# EAGLE board Layer 1 (EAGLE 6.5.0)
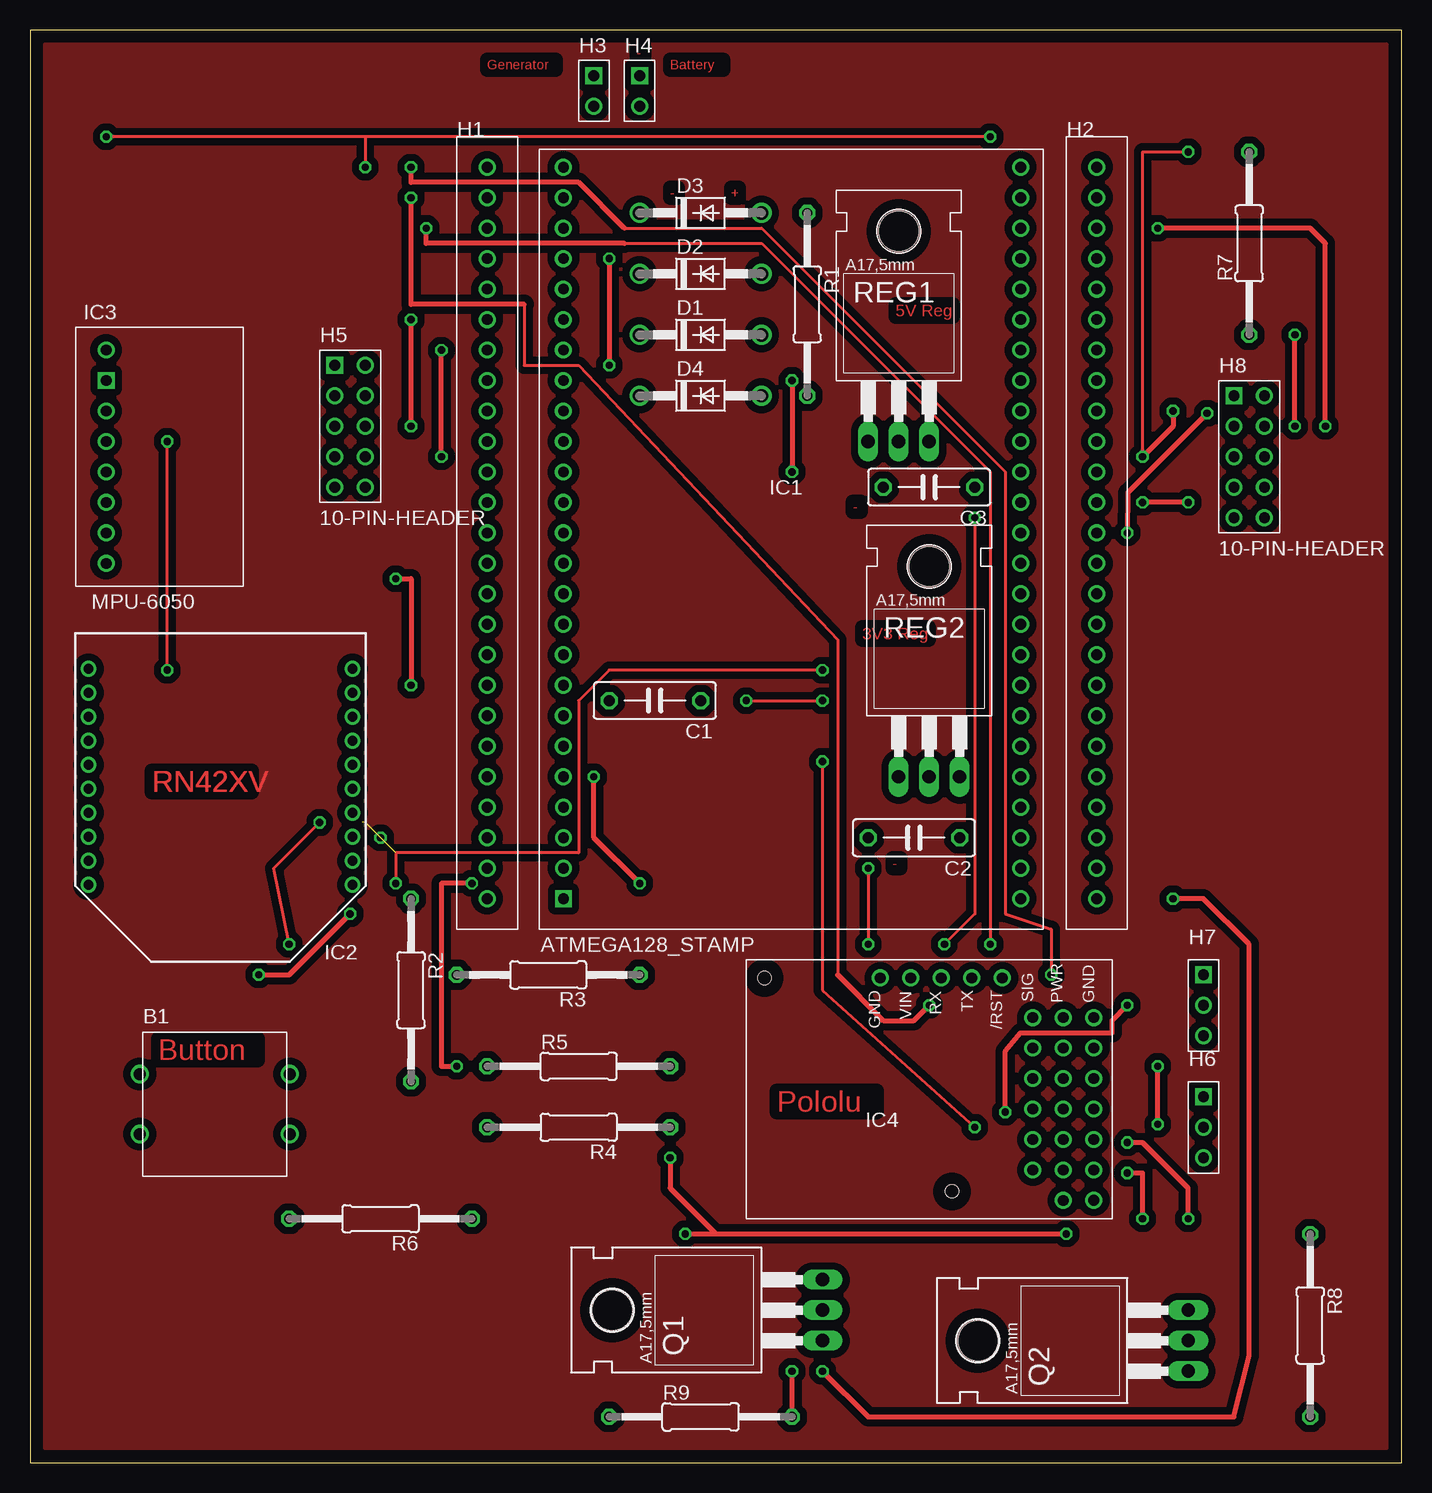
[diagram p0: board, top side]
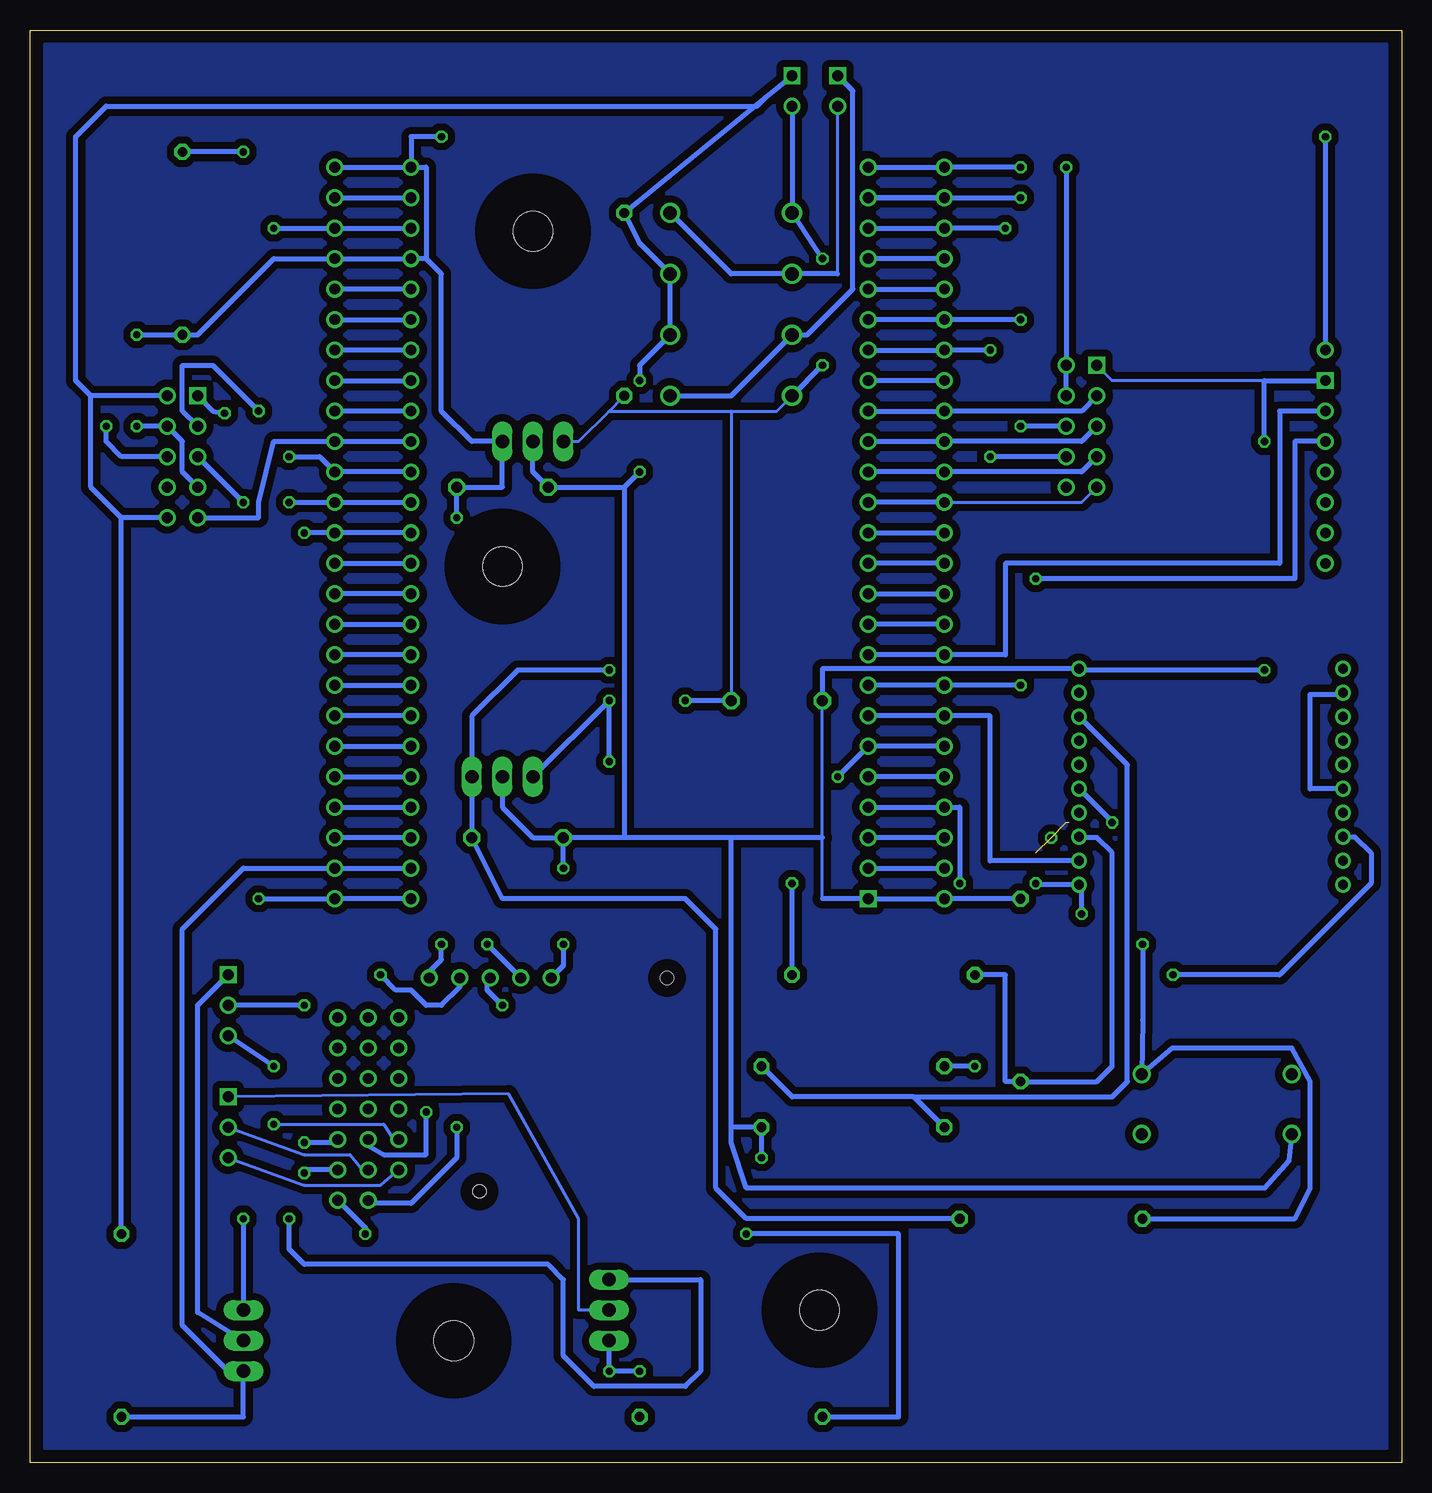
[diagram p1: board, bottom side, seen from below]

Size 114.3 x 119.38 mm. Coordinates in mm from the lower left corner, seen from the top.
Outline: 0,0 114.3,0 114.3,119.38 0,119.38 0,0
Copper layers (1*16): Top 0.035mm / dielectric 1.5mm / Bottom 0.035mm
Design rules "default": minimum track width 10mil, minimum drill 24mil, track to track 8mil, track to pad 8mil, pad to pad 8mil, via to via 8mil, smd to smd 8mil, copper to edge 40mil, drill to drill 8mil, minimum pad ring 10mil, minimum via ring 8mil, stop-mask expansion 4mil, vias tented up to drill 0mil, thermal gap 10mil

## Footprints (pad centres in the part's own frame; a part is rotated, then mirrored left to right if it is on the bottom)
BUTTON = drill 1: P1 -0.25,8.5; P2 -0.25,3.5; P3 12.25,8.5; P4 12.25,3.5
C075-032X103 = drill 0.914 octagon: 1 -3.81,0; 2 3.81,0
DO41-10 = drill 1.118: A 5.08,0; C -5.08,0
25-PIN-HEADER = drill 0.9: P$1 -7.62,15.24; P$2 -7.62,12.7; P$3 -7.62,10.16; P$4 -7.62,7.62; P$5 -7.62,5.08; P$6 -7.62,2.54; P$7 -7.62,0; P$8 -7.62,-2.54; P$9 -7.62,-5.08; P$10 -7.62,-7.62; P$11 -7.62,-10.16; P$12 -7.62,-12.7; P$13 -7.62,-15.24; P$14 -7.62,-17.78; P$15 -7.62,-20.32; P$16 -7.62,-22.86; P$17 -7.62,-25.4; P$18 -7.62,-27.94; P$19 -7.62,-30.48; P$20 -7.62,-33.02; P$21 -7.62,-35.56; P$22 -7.62,-38.1; P$23 -7.62,-40.64; P$24 -7.62,-43.18; P$25 -7.62,-45.72
2-PIN-HEADER = drill 0.9 square: P1 -17.78,6.35 | drill 0.9: P2 -17.78,3.81
10-PIN-HEADER = drill 0.9 square: 1 0,12.7 | drill 0.9: 2 2.54,12.7; 3 0,10.16; 4 2.54,10.16; 5 0,7.62; 6 2.54,7.62; 7 0,5.08; 8 2.54,5.08; 9 0,2.54; 10 2.54,2.54
3-PIN-HEADER = drill 0.9 square: P1 -12.7,10.16 | drill 0.9: P2 -12.7,7.62; P3 -12.7,5.08
ATMEGA128_STAMP = drill 0.9: +5V 45.72,63.5; /PEN 45.72,60.96; /RES 45.72,58.42; PA0 45.726,2.543; PA1 45.726,5.083; PA2 45.726,7.623; PA3 45.726,10.163; PA4 45.72,12.7; PA5 45.72,15.24; PA6 45.72,17.78; PA7 45.72,20.32; PB0 7.62,43.18; PB1 7.62,40.64; PB2 7.62,38.1; PB3 7.62,35.56; PB4 7.62,33.02; PB5 7.62,30.48; PB6 7.62,27.94; PB7 7.62,25.4; PD0 7.62,22.86; PD1 7.62,20.32; PD2 7.62,17.78; PD3 7.62,15.24; PD4 7.623,12.703; PD5 7.626,10.163; PD6 7.626,7.623; PD7 7.626,5.083; PE0 7.62,63.5; PE1 7.62,60.96; PE2 7.62,58.42; PE3 7.62,55.88; PE4 7.62,53.34; PE5 7.62,50.8; PE6 7.62,48.26; PE7 7.62,45.72; PF0 45.72,22.86; PF1 45.72,25.4; PF2 45.72,27.94; PF3 45.72,30.48; PF4 45.72,33.02; PF5 45.72,35.56; PF6 45.72,38.1; PF7 45.72,40.64; PG0 45.72,43.18; PG1 45.72,45.72; PG2 45.72,48.26; PG3 45.72,50.8; PG4 45.72,53.34; VREF 45.72,55.88 | drill 0.9 square: GND 7.626,2.543
RN42XV = drill 0.8 pad 1.27: 3V3 3.92,17.985; AIO0 1.92,-4.015; AIO1 3.92,-4.015; CTS -4.08,-4.015; GND -14.08,17.985; GPIO2 -10.08,-4.015; GPIO3 -2.08,-4.015; GPIO4 -10.08,17.985; GPIO5 -6.08,-4.015; GPIO6 -6.08,17.985; GPIO7 -2.08,17.985; GPIO7_ -0.08,-4.015; GPIO8 -14.08,-4.015; GPIO9 -8.08,17.985; GPIO11 -12.08,17.985; NC -8.08,-4.015; RESET_N -4.08,17.985; RTS -12.08,-4.015; RXD -0.08,17.985; TXD 1.92,17.985
MPU-6050 = drill 0.9: AD0 2.54,5.08; INT 2.54,2.54; SCL 2.54,15.24; SDA 2.54,12.7; VCC 2.54,20.32; XCL 2.54,7.62; XDA 2.54,10.16 | drill 0.9 square: GND 2.54,17.78
POLOLU_MICRO_MAESTRO = drill 0.9: /RST -21.336,1.524; GND -28.956,20.041; GND0 -28.956,17.526; GND1 -28.956,14.986; GND2 -28.956,12.446; GND3 -28.956,9.906; GND4 -28.956,7.366; GND5 -28.956,4.826; GND_ -11.176,1.524; RX -16.256,1.524; SIG0 -23.876,17.526; SIG1 -23.876,14.986; SIG2 -23.876,12.446; SIG3 -23.876,9.906; SIG4 -23.876,7.366; SIG5 -23.876,4.826; TX -18.796,1.524; V0 -26.416,17.526; V1 -26.416,14.986; V2 -26.416,12.446; V3 -26.416,9.906; V4 -26.416,7.366; V5 -26.416,4.826; VCC -26.416,20.066; VIN -13.716,1.524 | hole 1.092: -1.524,1.524; -17.145,19.304
TO220BH = drill 1.118 long: D 0,-6.35; G -2.54,-6.35; S 2.54,-6.35 | hole 3.302: 0,11.176
0207/15 = drill 0.813 octagon: 1 -7.62,0; 2 7.62,0
TO220 = drill 1.118 long: GND 0,-6.35; IN -2.54,-6.35; OUT 2.54,-6.35 | hole 3.302: 0,11.176

## Placement (x,y rotation side)
B1  BUTTON  [BUTTON]  9.4,23.88 0 top
C1  [C075-032X103]  52.07,63.5 180 top
C2  [C075-032X103]  73.66,52.07 180 top
C3  [C075-032X103]  74.93,81.28 180 top
D1  1N4004  [DO41-10]  55.88,93.98 0 top
D2  1N4004  [DO41-10]  55.88,99.06 0 top
D3  1N4004  [DO41-10]  55.88,104.14 0 top
D4  1N4004  [DO41-10]  55.88,88.9 0 top
H1  25-PIN-HEADER  [25-PIN-HEADER]  45.72,92.71 0 top
H2  25-PIN-HEADER  [25-PIN-HEADER]  96.52,92.71 0 top
H3  2-PIN-HEADER  [2-PIN-HEADER]  64.77,109.22 0 top
H4  2-PIN-HEADER  [2-PIN-HEADER]  68.58,109.22 0 top
H5  10-PIN-HEADER  [10-PIN-HEADER]  25.4,78.74 0 top
H6  3-PIN-HEADER  [3-PIN-HEADER]  110.49,20.32 0 top
H7  3-PIN-HEADER  [3-PIN-HEADER]  110.49,30.48 0 top
H8  10-PIN-HEADER  [10-PIN-HEADER]  100.33,76.2 0 top
IC1  ATMEGA128_STAMP  [ATMEGA128_STAMP]  36.83,44.45 0 top
IC2  RN42XV  [RN42XV]  8.89,52.07 270 top
IC3  MPU-6050  [MPU-6050]  3.81,72.39 0 top
IC4  POLOLU_MICRO_MAESTRO  [POLOLU_MICRO_MAESTRO]  59.69,41.91 180 top
Q1  [TO220BH]  59.69,12.7 90 top
Q2  [TO220BH]  90.17,10.16 90 top
R1  [0207/15]  64.77,96.52 270 top
R2  [0207/15]  31.75,39.37 270 top
R3  [0207/15]  43.18,40.64 180 top
R4  [0207/15]  45.72,27.94 180 top
R5  [0207/15]  45.72,33.02 0 top
R6  [0207/15]  29.21,20.32 180 top
R7  [0207/15]  101.6,101.6 90 top
R8  [0207/15]  106.68,11.43 270 top
R9  [0207/15]  55.88,3.81 0 top
REG1  VOLTAGE_REGULATORTO220  [TO220]  72.39,91.44 0 top
REG2  VOLTAGE_REGULATORTO220  [TO220]  74.93,63.5 0 top

## Library data of the parts
B1 H1-H8 IC1 IC3 IC4 REG1 REG2 = SmartBike
C1-C3 R1-R9 = resistor
D1-D4 = diode
IC2 = maxstream
Q1 Q2 = transistor-power

## Nets
3V3: C2.1 IC2.3V3 IC2.GPIO7_ R6.1 REG2.OUT
5V: C3.1 H2.P$1 H2.P$4 H5.2 H5.4 H8.4 H8.7 IC1.+5V IC1.VREF IC3.VCC IC4.VIN R7.1 REG1.OUT
6V: C1.1 D3.C D4.C H4.P2 IC4.VCC R1.2 REG1.IN REG2.IN
/PEN: H2.P$2 IC1./PEN
/RES: H2.P$3 H8.6 IC1./RES
GND: B1.P2 C1.2 C2.2 C3.2 D1.A D2.A H1.P$25 H4.P1 H5.1 H8.2 H8.10 IC1.GND IC2.GND IC3.GND IC4.GND IC4.GND_ R1.1 R2.1 R4.1 R8.1 R9.1 REG1.GND REG2.GND
N$1: IC2.RXD R2.2 R3.2
N$2: D2.C D3.A H3.P2
N$3: H6.P2 IC4.V0
N$4: D1.C D4.A H3.P1
N$5: H6.P3 IC4.SIG0
N$6: B1.P3 IC2.RESET_N R6.2
N$7: IC2.GPIO4 R4.2 R5.2
N$8: IC2.CTS IC2.RTS
N$9: H7.P2 IC4.V1
N$10: H7.P3 IC4.SIG1
N$11: H6.P1 Q1.D
N$12: IC4.GND0 Q1.S
N$13: IC4.GND1 Q2.S
N$14: H7.P1 Q2.D
PA0: H2.P$25 IC1.PA0 Q1.G R9.2
PA1: H2.P$24 IC1.PA1 Q2.G R8.2
PA2: H2.P$23 IC1.PA2
PA3: H2.P$22 IC1.PA3
PA4: H2.P$21 IC1.PA4
PA5: H2.P$20 IC1.PA5
PA6: H2.P$19 IC1.PA6
PA7: H2.P$18 IC1.PA7
PB0: H1.P$9 H5.3 IC1.PB0
PB1: H1.P$10 H5.5 IC1.PB1
PB2: H1.P$11 H5.7 IC1.PB2
PB3: H1.P$12 H5.9 IC1.PB3
PB4: H1.P$13 IC1.PB4
PB5: H1.P$14 IC1.PB5
PB6: H1.P$15 IC1.PB6
PB7: H1.P$16 IC1.PB7
PD0: H1.P$17 IC1.PD0 IC3.SCL
PD1: H1.P$18 IC1.PD1 IC3.SDA
PD2: H1.P$19 IC1.PD2 IC2.TXD
PD3: H1.P$20 IC1.PD3 R3.1
PD4: H1.P$21 IC1.PD4
PD5: H1.P$22 IC1.PD5 R5.1
PD6: H1.P$23 IC1.PD6
PD7: H1.P$24 IC1.PD7
PE0: H1.P$1 IC1.PE0 IC4.TX
PE1: H1.P$2 IC1.PE1 IC4.RX
PE2: H1.P$3 IC1.PE2 IC4./RST
PE3: H1.P$4 IC1.PE3
PE4: H1.P$5 IC1.PE4
PE5: H1.P$6 H5.6 IC1.PE5
PE6: H1.P$7 H5.8 IC1.PE6
PE7: H1.P$8 IC1.PE7
PF0: H2.P$17 IC1.PF0
PF1: H2.P$16 IC1.PF1
PF2: H2.P$15 IC1.PF2
PF3: H2.P$14 IC1.PF3
PF4: H2.P$13 H8.1 IC1.PF4
PF5: H2.P$12 H8.5 IC1.PF5
PF6: H2.P$11 H8.3 IC1.PF6 R7.2
PF7: H2.P$10 H8.9 IC1.PF7
PG0: H2.P$9 IC1.PG0
PG1: H2.P$8 IC1.PG1
PG2: H2.P$7 IC1.PG2
PG3: H2.P$6 IC1.PG3
PG4: H2.P$5 IC1.PG4

## Tracks (layer width: path | path; a pad name or v marks a point on that pad's centre or on a via)
3V3  (via drill 0.6)  (3 unrouted)
  Top 0.254: v66.04,66.04 48.26,66.04 45.72,63.5 45.72,50.8 30.48,50.8 v30.48,48.26
  Top 0.406: v19.05,40.64 21.59,40.64 v26.67,45.72
  Bottom 0.406: v30.48,48.26 30.48,48.15 IC2.3V3 26.67,47.95 v26.67,45.72 | R6.1 54.61,20.32 57.15,22.86 57.15,44.45 59.69,46.99 74.93,46.99 C2.1 REG2.OUT 77.47,62.23 73.66,66.04 v66.04,66.04 | IC2.GPIO7_ 3.89,52.15 2.54,50.8 2.54,48.26 10.16,40.64 v19.05,40.64
  other vias: 29.21,52.07
5V  (via drill 0.6)
  Top 0.254: v80.01,110.49 27.94,110.49 | 27.94,110.49 v6.35,110.49 | 27.94,110.49 v27.94,107.95 | v76.2,43.18 78.74,45.72 v78.74,78.74
  Top 0.406: v105.41,86.36 v105.41,93.98
  Bottom 0.406: 81.28,100.33 IC1.VREF H2.P$4 93.98,100.33 100.33,93.98 R7.1 v105.41,93.98 | H2.P$1 IC1.+5V | IC1.+5V 81.28,107.95 81.28,100.33 | v6.35,110.49 IC3.VCC | v80.01,110.49 82.55,110.49 IC1.+5V | v27.94,107.95 H5.2 H5.4 | 81.28,100.33 80.01,99.06 80.01,87.63 77.47,85.09 REG1.OUT 74.93,81.28 C3.1 v78.74,78.74 | IC4.VIN v76.2,43.18 | v105.41,86.36 H8.4 101.6,85.09 101.6,82.55 H8.7
6V  (via drill 0.6)
  Top 0.254: v59.69,63.5 v66.04,63.5 | v78.74,27.94 66.04,39.37 v66.04,58.42
  Top 0.406: v48.26,100.33 v48.26,91.44
  Bottom 0.254: 66.04,87.63 68.58,85.09 REG1.IN | 66.04,87.63 R1.2 | D4.C 52.07,87.63 55.88,87.63 | 66.04,87.63 55.88,87.63 | 55.88,87.63 C1.1
  Bottom 0.406: H4.P2 D3.C v48.26,100.33 | C1.1 v59.69,63.5 | REG2.IN v66.04,63.5 v66.04,58.42 | D4.C v48.26,91.44 | v78.74,27.94 78.74,25.4 82.55,21.59 85.85,21.59 IC4.VCC
/PEN
  Bottom 0.406: H2.P$2 IC1./PEN
/RES  (via drill 0.6)
  Top 0.406: v107.95,86.36 107.95,101.6 106.68,102.87 v93.98,102.87
  Bottom 0.406: IC1./RES H2.P$3 v93.98,102.87 | H8.6 106.68,83.82 107.95,85.09 v107.95,86.36
GND  (via drill 0.6)
  Top 0.254: v11.43,66.04 v11.43,85.09 | v69.85,49.53 v69.85,43.18
  Top 0.406: v63.5,90.17 v63.5,82.55 | v53.34,25.4 53.34,22.86 57.15,19.05 | 57.15,19.05 v86.36,19.05 | v54.61,19.05 57.15,19.05
  Bottom 0.254: 48.26,46.99 48.26,52.07 C1.2 | H5.1 24.13,90.17 11.43,90.17
  Bottom 0.406: REG1.GND 72.39,82.55 C3.2 64.77,81.28 | 64.77,81.28 64.77,52.07 | 64.77,52.07 C2.2 | 48.26,52.07 55.88,52.07 | 55.88,52.07 64.77,52.07 | v63.5,90.17 63.5,91.44 D1.A D2.A 63.5,101.6 R1.1 52.94,113.82 | 64.77,81.28 v63.5,82.55 | C1.2 48.26,66.15 IC2.GND 26.88,66.04 v11.43,66.04 | R2.1 H1.P$25 IC1.GND 48.26,46.99 | 55.88,27.94 55.88,26.67 54.61,22.86 11.43,22.86 9.4,25.14 B1.P2 | 55.88,27.94 55.88,52.07 | 55.88,27.94 R4.1 v53.34,25.4 | v11.43,85.09 11.43,90.17 IC3.GND | 52.94,113.82 H4.P1 | REG2.GND 74.93,54.61 72.39,52.07 C2.2 | v86.36,19.05 86.36,19.58 IC4.GND | v69.85,43.18 69.85,41.4 IC4.GND_ | v69.85,49.53 C2.2 | H8.2 109.22,88.9 | 109.22,88.9 110.49,90.17 110.49,110.49 107.95,113.03 53.73,113.03 52.94,113.82 | H8.10 106.68,78.74 | 106.68,78.74 109.22,81.28 109.22,88.9 | R9.1 41.91,3.81 41.91,19.05 v54.61,19.05 | R8.1 106.68,78.74
N$1
  Bottom 0.406: R3.2 33.02,40.64 33.02,31.75 R2.2 25.4,31.75 24.13,33.02 24.13,50.8 25.4,52.07 26.8,52.07 IC2.RXD
N$2
  Bottom 0.254: 46.99,99.06 H3.P2
  Bottom 0.406: 46.99,99.06 D2.C 55.88,99.06 D3.A
N$3
  Bottom 0.254: H6.P2 91.44,25.65 87.63,25.65 86.36,24.13 IC4.V0
N$4
  Bottom 0.406: D4.A 55.88,88.9 D1.C 49.53,93.98 45.72,97.79 45.72,114.3 H3.P1
N$5
  Bottom 0.254: IC4.SIG0 85.09,23.11 91.44,23.11 H6.P3
N$6  (via drill 0.6)
  Top 0.254: v24.13,53.34 20.32,49.53 v21.59,43.18
  Bottom 0.406: v24.13,53.34 24.13,53.41 IC2.RESET_N | v21.59,43.18 21.59,36.89 B1.P3 19.11,34.54 9.14,34.54 7.62,31.75 7.62,22.86 8.89,20.32 R6.2
N$7
  Bottom 0.406: R4.2 40.64,30.48 | 40.64,30.48 50.8,30.48 R5.2 | 40.64,30.48 24.13,30.48 22.86,31.75 22.86,58.13 IC2.GPIO4
N$8
  Bottom 0.406: IC2.CTS 7.62,56.15 7.62,64.01 4.88,64.01 IC2.RTS
N$9  (via drill 0.6)
  Top 0.406: v81.28,29.21 81.28,34.29 82.55,35.81 90.17,35.81 90.17,36.83 v91.44,38.1
  Bottom 0.406: IC4.V1 86.11,26.42 84.84,25.65 81.28,25.65 v81.28,29.21 | v91.44,38.1 H7.P2
N$10  (via drill 0.6)
  Top 0.406: v93.98,28.19 v93.98,33.02
  Bottom 0.254: v93.98,28.19 84.84,28.19 83.82,26.67 IC4.SIG1
  Bottom 0.406: v93.98,33.02 H7.P3
N$11
  Bottom 0.254: H6.P1 74.42,30.73 68.58,20.32 68.58,12.7 Q1.D
N$12  (via drill 0.6)
  Top 0.406: v92.71,20.32 92.71,24.13 v91.44,24.13
  Bottom 0.406: Q1.S 58.42,15.24 58.42,7.62 59.69,6.35 67.31,6.35 69.85,8.89 69.85,15.24 71.12,16.51 91.44,16.51 92.71,17.78 v92.71,20.32 | IC4.GND0 91.19,24.38 v91.44,24.13
N$13  (via drill 0.6)
  Top 0.406: v96.52,20.32 96.52,22.86 92.71,26.67 v91.44,26.67
  Bottom 0.254: 88.9,26.67 IC4.GND1
  Bottom 0.406: v96.52,20.32 Q2.S | 88.9,26.67 v91.44,26.67
N$14
  Bottom 0.406: Q2.D 100.33,12.51 100.33,38.1 H7.P1
N$15
  pour Top (isolate 0.61): 1.27,118.11 1.27,1.27 113.03,1.27 113.03,118.11
N$16
  pour Bottom (isolate 0.61): 1.27,118.11 113.03,118.11 113.03,1.27 1.27,1.27
PA0  (via drill 0.6)
  Top 0.406: v66.04,7.62 69.85,3.81 100.33,3.81 101.6,8.89 101.6,43.18 97.79,46.99 v95.25,46.99 | R9.2 v63.5,7.62
  Bottom 0.406: IC1.PA0 H2.P$25 v95.25,46.99 | v63.5,7.62 v66.04,7.62 Q1.G
PA1
  Bottom 0.406: IC1.PA1 H2.P$24 96.52,49.53 101.6,44.45 101.6,11.43 97.79,7.62 Q2.G 96.52,3.81 R8.2
PA2
  Bottom 0.406: IC1.PA2 H2.P$23
PA3
  Bottom 0.406: H2.P$22 IC1.PA3
PA4
  Bottom 0.406: H2.P$21 IC1.PA4
PA5
  Bottom 0.406: H2.P$20 IC1.PA5
PA6
  Bottom 0.406: IC1.PA6 H2.P$19
PA7
  Bottom 0.406: H2.P$18 IC1.PA7
PB0
  Bottom 0.406: IC1.PB0 H1.P$9 26.67,87.63 H5.3
PB1
  Bottom 0.406: IC1.PB1 H1.P$10 26.67,85.09 H5.5
PB2
  Bottom 0.406: IC1.PB2 H1.P$11 26.67,82.55 H5.7
PB3
  Bottom 0.254: H5.9 26.67,80.01 H1.P$12
  Bottom 0.406: H1.P$12 IC1.PB3
PB4
  Bottom 0.406: IC1.PB4 H1.P$13
PB5
  Bottom 0.406: H1.P$14 IC1.PB5
PB6
  Bottom 0.406: IC1.PB6 H1.P$15
PB7
  Bottom 0.406: H1.P$16 IC1.PB7
PD0
  Bottom 0.406: IC1.PD0 H1.P$17 33.02,67.31 33.02,74.93 10.16,74.93 10.16,87.63 IC3.SCL
PD1  (via drill 0.6)
  Top 0.406: v30.48,73.66 31.75,73.66 v31.75,64.77
  Bottom 0.406: IC1.PD1 H1.P$18 v31.75,64.77 | IC3.SDA 8.89,85.09 8.89,73.66 v30.48,73.66
PD2
  Bottom 0.406: IC1.PD2 H1.P$19 34.29,62.23 34.29,50.15 IC2.TXD
PD3  (via drill 0.6)
  Top 0.406: v50.8,48.26 46.99,52.07 v46.99,57.15
  Bottom 0.406: H1.P$20 IC1.PD3 v46.99,57.15 | R3.1 v50.8,48.26
PD4
  Bottom 0.406: H1.P$21 IC1.PD4
PD5  (via drill 0.6)
  Top 0.406: v36.83,48.26 34.29,48.26 34.29,33.02 v35.56,33.02
  Bottom 0.406: IC1.PD5 H1.P$22 | H1.P$22 | H1.P$22 36.83,54.61 v36.83,48.26 | v35.56,33.02 R5.1
PD6
  Bottom 0.406: H1.P$23 IC1.PD6
PD7
  Bottom 0.406: IC1.PD7 H1.P$24
PE0  (via drill 0.6)
  Top 0.254: v85.09,40.64 85.09,44.45 81.28,45.72 81.28,82.55 60.96,102.87 49.53,102.87
  Top 0.406: 49.53,102.87 45.72,106.68 31.75,106.68 v31.75,107.95
  Bottom 0.406: IC1.PE0 H1.P$1 v31.75,107.95 | IC4.TX 78.49,39.62 80.01,38.1 81.28,38.1 82.55,39.37 83.82,39.37 v85.09,40.64
PE1  (via drill 0.6)
  Top 0.254: 67.31,40.64 67.31,68.58 45.72,91.44 41.18,91.44 41.18,96.52
  Top 0.406: 67.31,40.64 71.12,36.83 73.66,36.83 v74.93,38.1 | 41.18,96.52 31.75,96.52 v31.75,105.41
  Bottom 0.406: H1.P$2 IC1.PE1 v31.75,105.41 | v74.93,38.1 76.2,39.37 76.2,40.13 IC4.RX
PE2  (via drill 0.6)
  Top 0.254: v80.01,43.18 80.01,82.55 60.96,101.6 49.53,101.6
  Top 0.406: 49.53,101.6 33.02,101.6 v33.02,102.87
  Bottom 0.406: IC1.PE2 H1.P$3 v33.02,102.87 | IC4./RST 81.03,40.89 80.01,41.91 v80.01,43.18
PE3
  Bottom 0.406: H1.P$4 IC1.PE3
PE4
  Bottom 0.406: IC1.PE4 H1.P$5
PE5  (via drill 0.6)
  Top 0.406: v31.75,86.36 v31.75,95.25
  Bottom 0.406: IC1.PE5 H1.P$6 v31.75,95.25 | H5.6 v31.75,86.36
PE6  (via drill 0.6)
  Top 0.406: v34.29,83.82 v34.29,92.71
  Bottom 0.406: IC1.PE6 H1.P$7 v34.29,92.71 | H5.8 v34.29,83.82
PE7
  Bottom 0.406: H1.P$8 IC1.PE7
PF0
  Bottom 0.406: IC1.PF0 H2.P$17
PF1
  Bottom 0.406: H2.P$16 IC1.PF1
PF2
  Bottom 0.406: IC1.PF2 H2.P$15
PF3
  Bottom 0.406: H2.P$14 IC1.PF3
PF4  (via drill 0.6)
  Top 0.406: v98.09,87.43 91.49,80.83 v91.44,77.47
  Bottom 0.406: IC1.PF4 H2.P$13 v91.44,77.47 | H8.1 99.06,87.63 v98.09,87.43
PF5  (via drill 0.6)
  Top 0.406: v96.52,80.01 v92.71,80.01
  Bottom 0.406: IC1.PF5 H2.P$12 v92.71,80.01 | H8.5 v96.52,80.01
PF6  (via drill 0.6)
  Top 0.254: v96.52,109.22 92.71,109.22 v92.71,83.82
  Top 0.406: v95.25,87.63 95.25,86.36 v92.71,83.82
  Bottom 0.406: IC1.PF6 H2.P$11 90.17,83.82 v92.71,83.82 | H8.3 101.6,87.63 101.6,91.44 99.06,91.44 v95.25,87.63 | v96.52,109.22 R7.2
PF7
  Bottom 0.406: IC1.PF7 H2.P$10 93.98,85.09 95.25,80.01 95.25,78.74 H8.9
PG0
  Bottom 0.406: IC1.PG0 H2.P$9
PG1
  Bottom 0.406: H2.P$8 IC1.PG1
PG2
  Bottom 0.406: IC1.PG2 H2.P$7
PG3
  Bottom 0.406: H2.P$6 IC1.PG3
PG4
  Bottom 0.406: IC1.PG4 H2.P$5

## Text on the board
Top: - | Generator | Battery | - | + | 5V Reg | - | 3V3 Reg | RN42XV | RN42XV | RN42XV | RN42XV | RN42XV | - | Button | Pololu